# Altium PCB LM2596 Ayarlanabilir Buck Converter PCB.PcbDoc
Units mm, origin at the board's own origin, x right, y up, seen from the top; angles counter-clockwise.
Board outline 62 x 28 mm, 2 copper layers (Top Layer, Bottom Layer); 8 components, 5 nets, 24 pads, 2 vias.
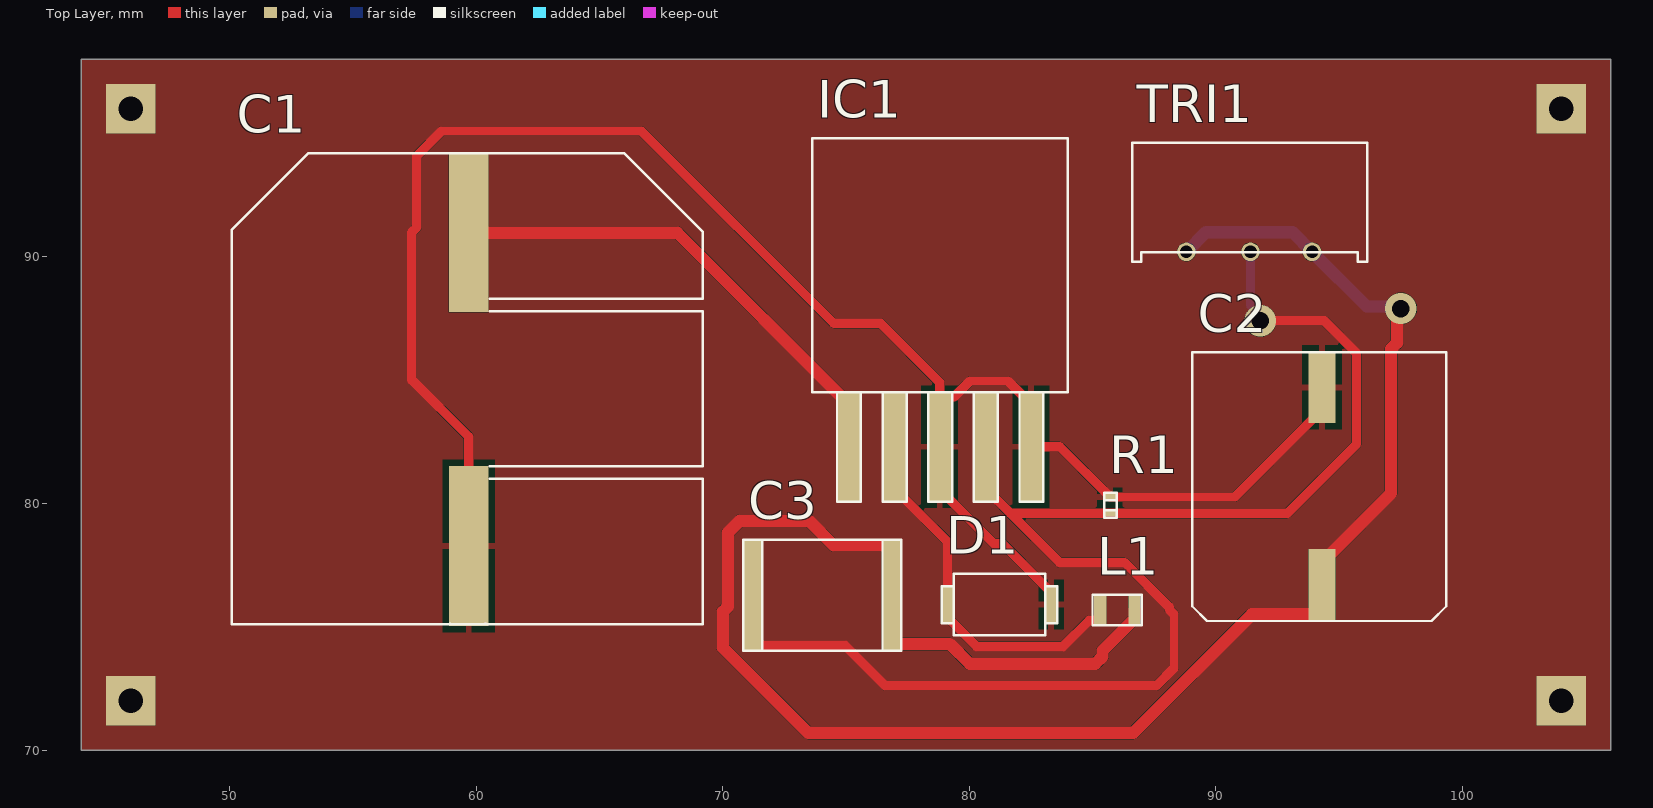
[diagram p0: Top Layer view]
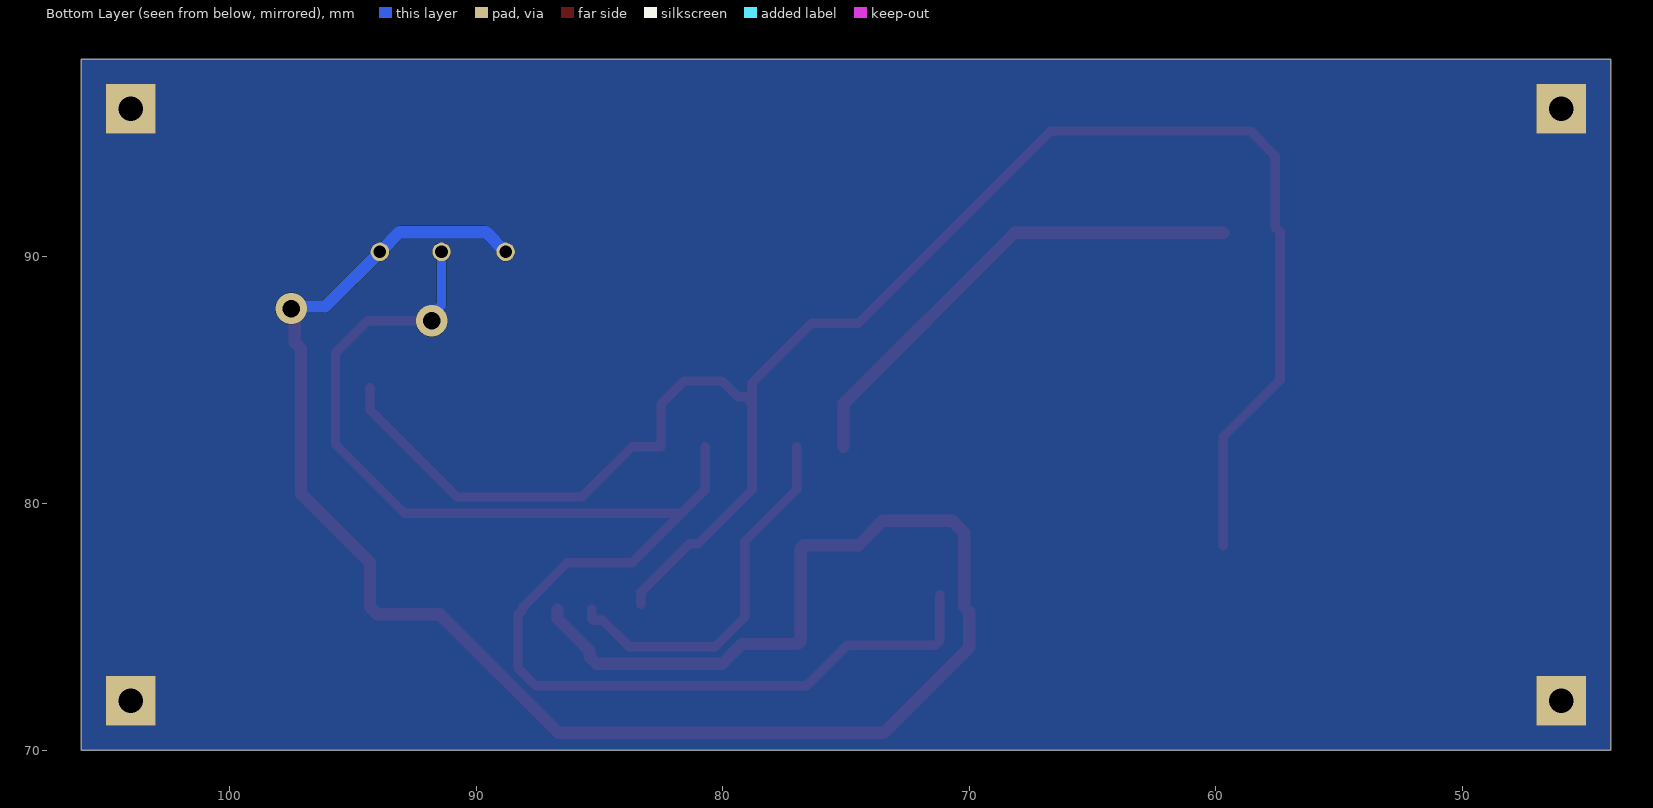
[diagram p1: Bottom Layer view, seen from below]

## Layer stack, top to bottom
Top Solder: solder mask 0.0102, Solder Resist, Dk 3.5
Top Layer: signal copper 0.0356
Dielectric 1: dielectric 0.32, FR-4, Dk 4.8
Bottom Layer: signal copper 0.0356
Bottom Solder: solder mask 0.0102, Solder Resist, Dk 3.5

## Board outline
44,70 44,98 106,98 106,70

## Design rules (kind name [scope] priority, off if disabled: settings)
Clearance [All] p1: gap=0 ignorepadtopadclearanceinfootprint=FALSE
Height [All] p1: minheight=0 maxheight=55 prefheight=0
HoleSize [All] p1: absolutevalues=TRUE maxlimit=90 minlimit=0 maxpercent=80.000 minpercent=20.000
HoleToHoleClearance [All] p1: gap=0 allowstackedmicrovias=TRUE
MinimumSolderMaskSliver [All] p1: minsoldermaskwidth=0
PolygonConnect [All] p1: connectstyle=Relief reliefconductorwidth=0.254 reliefentries=4 polygonreliefangle="90 Angle" airgapwidth=0.254
RoutingVias [All] p1: holewidth=0.711 width=1.27 viastyle="Through Hole" minholewidth=0.711 minwidth=1.27 maxholewidth=0.711 maxwidth=1.27
SilkToSilkClearance [All] p1: silktosilkclearance=0
SilkToSolderMaskClearance [IsPad] p1: minsilkscreentomaskgap=0 clearancetoexposedcopper=TRUE
SolderMaskExpansion [All] p1: expansion=0 istentingtop=FALSE
UnRoutedNet [All] p1: checkbadconnections=TRUE
Width [All] p1: maxlimit=0.5 minlimit=0.239 preferedwidth=0.239 minimp=50.000000 maximp=50.000000 favimp=50.000000
23 further rules are at their usual default settings.

## Classes and differential pairs
component class "LM2596 Ayarlanabilir Buck Converter Şematik": C1 C2 C3 D1 IC1 L1 TRI1

## Components (designator, comment, footprint, x,y, rotation, side; value= is the part's Value field where it differs from the comment)
C1 "470uF" "470uF 50V Elektrolikit Kapasitör" 52.1,87.1 r0 top
C2 "220uF" "220uF 35V Elektrolikit Kapasitör" 96.84,78.731 r180 top
C3 "33nF" "33nF Kapasitör" 78.541,77.926 r0 top
D1 "40V 5A" "40V 5A Schottky Diyot" 80.573,72.649 r270 top
IC1 "LM2596S" LM2596S 82.5,85.5 r0 top
L1 "68uH" "68uH İndüktör" 87.995,74.303 r0 top
R1 "1k" "10k SMD Direnç" 84.481,77.924 r270 top
TRI1 "10k" "Düzenleyici Potansiyometre" 96,95.4 r270 top

## Footprints (in the part's own frame and the unit in brackets; to place one, negate y for a bottom-side part, rotate by r counter-clockwise, add the part's x,y. Pads: shape width x height; smd on the part's side, far side on the other; paste and mask are expansions set on the pad)
"10k SMD Direnç" [mm]
  rect 0.25x0.5 smd mask+0.01: 1(-2.337,1.219) 2(-1.676,1.219)
  silkscreen extent -2.5,1 -1.5,1.5
"33nF Kapasitör" [mm]
  rect 0.76x4.5 smd mask+0.01: 1(-7.341,-1.626) 2(-1.702,-1.626)
  silkscreen extent -7.7,-3.9 -1.3,0.6
"40V 5A Schottky Diyot" [mm]
  rect 1.5x0.5 smd mask+0.01: A(-3.251,2.743) K(-3.251,-1.473)
  silkscreen extent -4.5,-1.7 -2,3
"68uH İndüktör" [mm]
  rect 0.5x1.25 smd mask+0.01: 1(-2.692,1.397) 2(-1.295,1.397)
  silkscreen extent -3,0.75 -1,2
"220uF 35V Elektrolikit Kapasitör" [mm]
  rect 1.1x2.9 smd mask+0.01: +(2.54,2.032) -(2.54,-5.969)
  silkscreen extent -2.5,-7.4 7.8,3.5
"470uF 50V Elektrolikit Kapasitör" [mm]
  rect 1.6x6.45 smd mask+0.01: +(7.6,3.875)
  rect 1.6x6.5 smd mask+0.01: -(7.6,-8.825)
  silkscreen extent -2,-12 17.1,7.1
"Düzenleyici Potansiyometre" [mm]
  round 0.75 hole 0.51 mask+0.01: 1(5.2,-7.2) 2(5.2,-4.6) 3(5.2,-2.1)
  silkscreen extent 0.77,-9.4 5.6,0.13
LM2596S [mm]
  rect 0.97x4.44 smd mask+0.01: 1(-7.4,-3.2) 2(-5.5,-3.2) 3(-3.7,-3.2) 4(-1.8,-3.2) 5(0,-3.2)
  silkscreen extent -8.86,-5.44 1.5,9.31

## Part data
C1: library part "470uF 50V Elektrolikit Kapasitör"
C2: library part "220uF 35V Elektrolikit Kapasitör"
C3: library part "33nF Kapasitör"
D1: library part "40V 5A Schottky Diyot"
L1: library part "68uH İndüktör"
R1: library part "10k SMD Direnç"
TRI1: library part "Düzenleyici Potansiyometre"

## Free pads (board coordinates)
  rect 2x2 hole 1 mask+0: GNDin(46,72) GNDout(104,72) VCCin(46,96) VCCout(104,96)

## Via types
v1: diameter 1.27, hole 0.711, Top Layer to Bottom Layer, 2 vias

## Nets (pads, with @x,y where several pads share a name; then routed paths per layer and width w, separated by ;. In a path a pad name is that pad's centre, name@x,y a point inside that pad or via, vN(x,y) a via of type N, cw(c..) or ccw(c..) an arc to the next point about the centre after c; other vN are vias at no path point)
GND: C1.- C2.- D1.A IC1.3 IC1.5 R1.1 | length 75
  Top Layer w0.381: C1.- 59.7,82.7 57.4,85 57.4,91 57.6,91.2 57.6,94.1 58.6,95.1 66.7,95.1 74.5,87.3 76.4,87.3 78.8,84.9 IC1.3@78.8,84.035 ; D1.A 83.316,76.4 81.351,78.365 81,78.365 78.8,80.565 IC1.3 IC1.3@78.8,84.035 ; C2.- 94.3,83.8 90.76,80.26 R1.1 85.7,80.266 83.666,82.3 IC1.5 82.5,84.035 81.57,84.964 80.031,84.964 79.396,84.329 79.095,84.329 IC1.3@78.8,84.035
NetC3_1: C3.1 IC1.4 R1.2 TRI1.2 | length 60
  Top Layer w0.381: C3.1 71.2,74.43 71.39,74.24 74.959,74.24 76.6,72.6 87.577,72.6 88.3,73.323 88.3,75.5 88.1,75.7 88.1,75.804 86.304,77.6 83.665,77.6 81.665,79.6 ; IC1.4 80.7,80.565 81.665,79.6 ; v1(91.8,87.4) 94.4,87.4 95.7,86.1 95.7,82.4 92.9,79.6 R1.2 81.665,79.6
  Bottom Layer w0.381: TRI1.2 91.4,88.041 91.8,87.641 v1(91.8,87.4)
NetD1_K: D1.K IC1.2 L1.1 | length 15.3
  Top Layer w0.381: IC1.2 77,80.565 79.1,78.465 D1.K 79.1,75.4 80.305,74.194 83.797,74.194 84.868,75.266 85.243,75.266 85.303,75.325 L1.1
VCCin: C1.+ IC1.1 | length 20
  Top Layer w0.5: C1.+ 68.16,90.975 75.1,84.035 IC1.1
VCCout: C2.+ C3.2 L1.2 TRI1.1 TRI1.3 | length 78.9
  Top Layer w0.5: L1.2 86.7,75.325 85.4,74.025 85.4,73.793 85.107,73.5 80.018,73.5 79.218,74.3 76.969,74.3 76.839,74.43 C3.2 76.839,78.17 76.709,78.3 74.5,78.3 73.5,79.3 70.7,79.3 70.2,78.8 70.2,75.8 70,75.6 70,74.157 73.457,70.7 86.659,70.7 91.458,75.499 94,75.499 94.3,75.799 C2.+ 94.3,77.599 97.1,80.399 97.1,86.265 97.353,86.518 97.353,87.753 v1(97.5,87.9)
  Bottom Layer w0.5: TRI1.1 89.6,91 93.1,91 TRI1.3 96.115,87.985 97.415,87.985 v1(97.5,87.9)

## Polygon pours and split planes (outlines as drawn)
GND on Top Layer "GND" (solid, pour order 0): 44,98 106,98 106,70 44,70
GND on Bottom Layer "GND" (solid, pour order 1): 44,98 106,98 106,70 44,70

## Silkscreen, mask and mechanical layers (free items; w line width, h text height)
Mechanical 1:
  the board outline again, w0.1